# Altium PCB {TEX137}_F2837x_controlCARD_R1.3_PCB_PADS.PcbDoc (part 2 of 6)
Units mil, origin at the board's own origin, x right, y up, seen from the top; angles counter-clockwise.
Board outline 4163.98 x 2011.3 mil, 10 copper layers (Primary Side, Inner Layer 2, Inner Layer 3, Inner Layer 4, Inner Layer 5, Inner Layer 6, Inner Layer 7, Inner Layer 8, Inner Layer 9, Secondary Side), stack 103.5 mil thick; 292 components, 317 nets, 1400 pads, 1032 vias.
Unrouted connection lines stored in the file: 106.
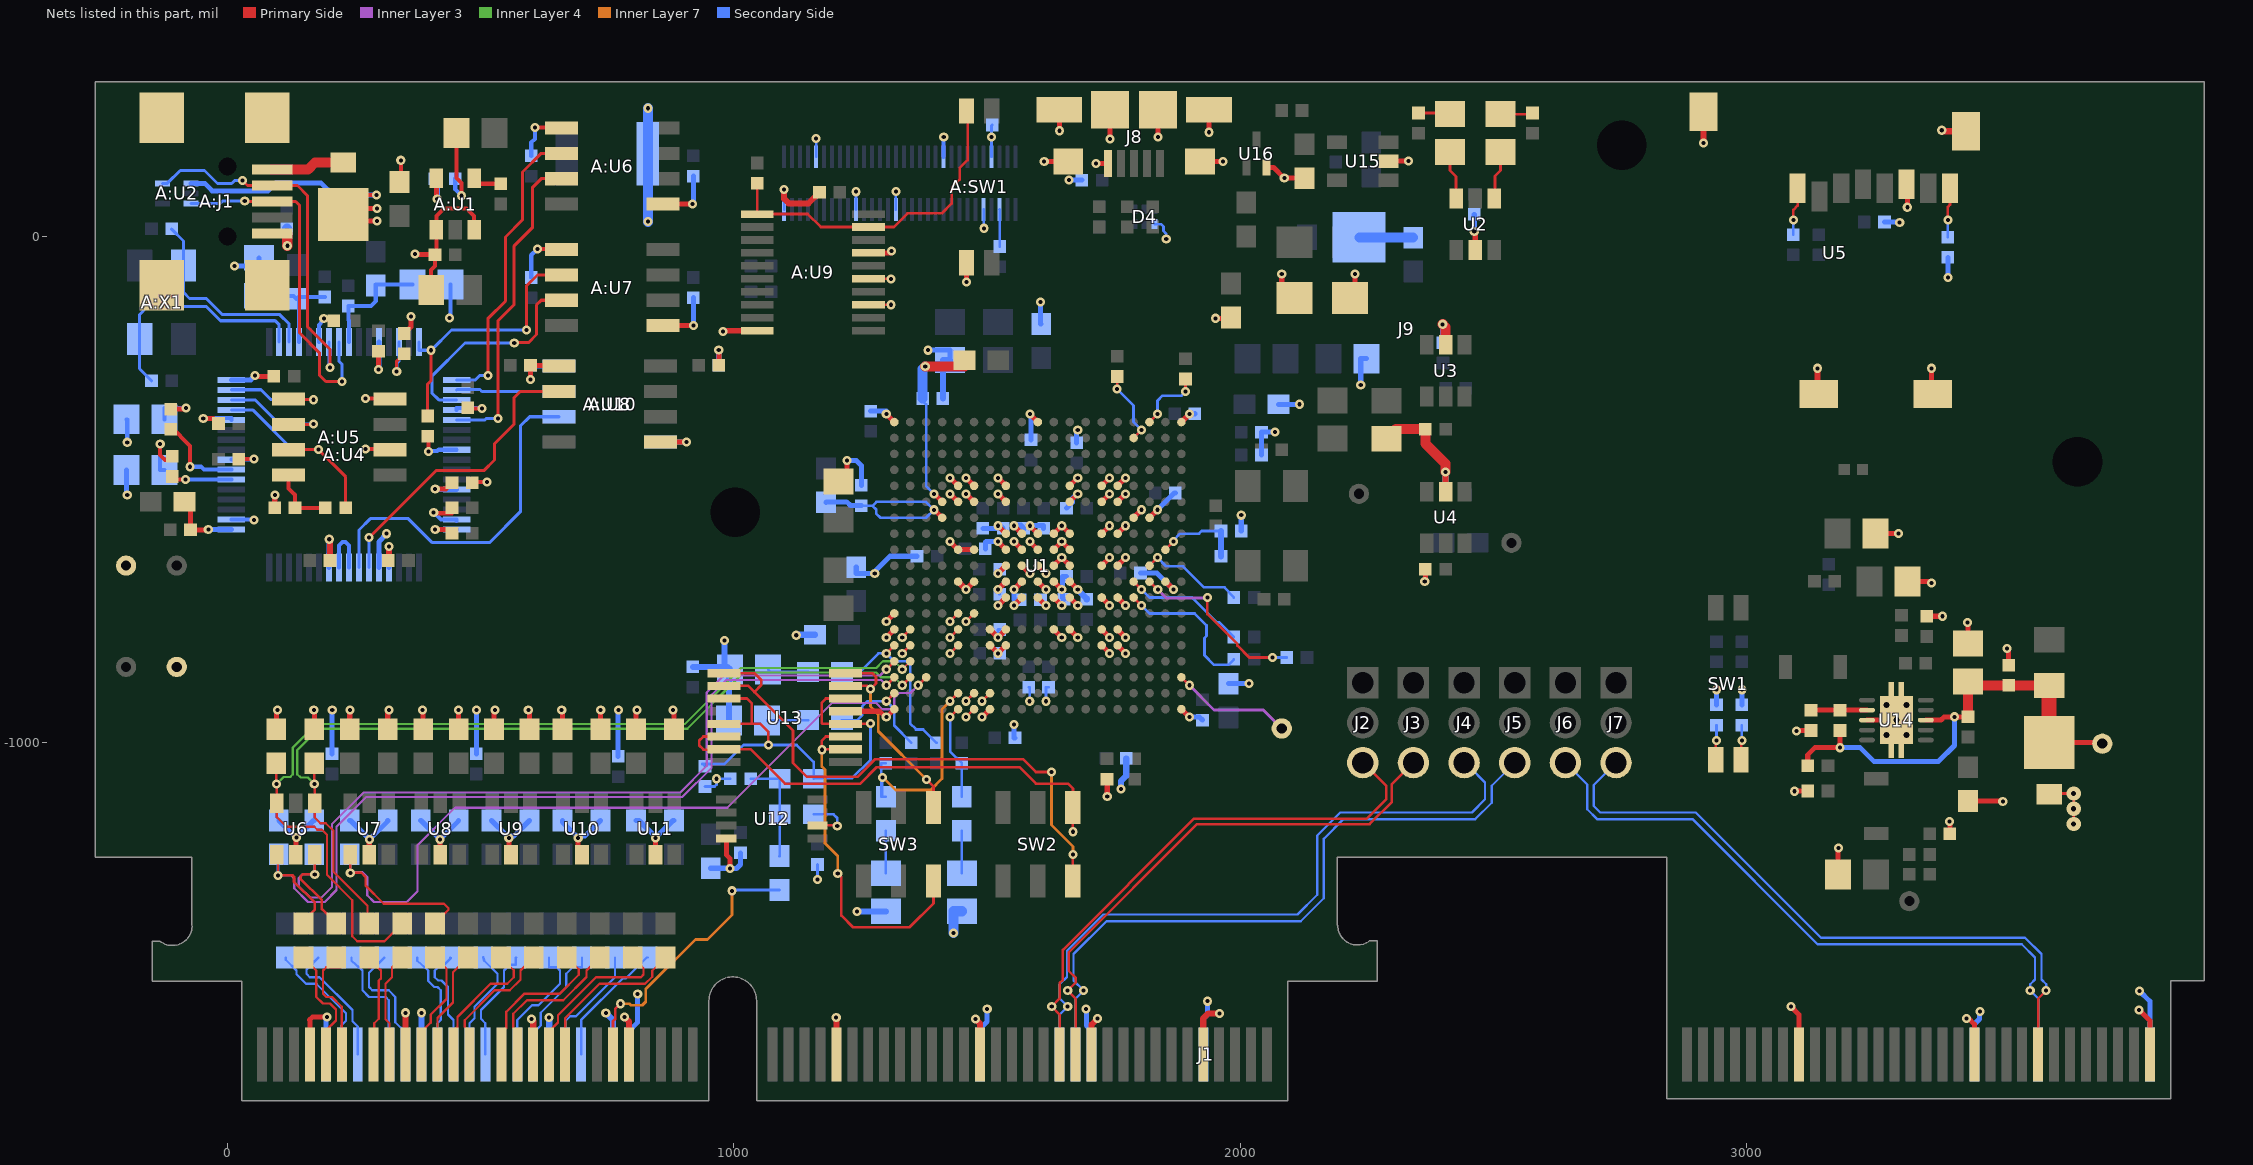
[diagram p10: the nets of this part, all layers, seen from the top]

## Via types
v1: diameter 18, hole 8, Primary Side to Secondary Side, 1025 vias
v2: diameter 28, hole 10, Primary Side to Secondary Side, 7 vias

## Nets (pads, with @x,y where several pads share a name; then routed paths per layer and width w, separated by ;. In a path a pad name is that pad's centre, name@x,y a point inside that pad or via, vN(x,y) a via of type N, cw(c..) or ccw(c..) an arc to the next point about the centre after c; other vN are vias at no path point) (continued)
$$$13142: R11.2 R12.2 U1.J18 | length 176.3
  Primary Side w5.3: U1.J18@1851.97,-618.5 v1(1867.76,-602.77)
  Secondary Side w5.3: v1(1867.76,-602.77) 1867.76,-600.35 1881.05,-587.02 1918.05,-587.02 1923.54,-581.54 R11.2@1961.54,-581.54
  Secondary Side w12: R12.2@1961.54,-631.54 R11.2@1961.54,-581.54
$$$13408: R54.2 R58.2 U1.V5 | length 442.3
  Primary Side w5.3: v1(1426.77,-917.72) U1.V5@1442.52,-901.97
  Inner Layer 7 w5.5: v1(1293,-1068) 1294,-1068 1319,-1093 1388.49,-1093 1410.9,-1070.59 1410.9,-933.59 v1(1426.77,-917.72)
  Secondary Side w5.3: v1(1293,-1068) R54.2@1293,-1106.5 ; R54.2@1300,-1106.5 R54.2@1293,-1106.5 ; R58.2@1300,-1040 1291,-1040 1291,-1106.5 R54.2@1293,-1106.5
$$$13414: R51.2 R55.2 U1.V1 | length 237.9
  Primary Side w5.3: v1(1300.79,-917.72) U1.V1@1316.54,-901.97
  Secondary Side w5.3: R51.2@1213.5,-955 1243.5,-955 1253.5,-945 1253.5,-927.52 1263.31,-917.72 v1(1300.79,-917.72) 1316.54,-933.47 1316.54,-966.02 1350,-999.49 R55.2@1350,-1000
$$$13416: R52.2 R56.2 U1.W5 | length 189.2
  Primary Side w5.3: v1(1426.77,-949.21) U1.W5@1442.52,-933.46
  Secondary Side w5.3: v1(1426.77,-949.21) 1426.77,-1016.77 R56.2@1450,-1040 R52.2@1450,-1106.5
$$$13417: R53.2 R57.2 U1.R1 | length 365.9
  Primary Side w5.3: v1(1300.79,-823.23) U1.R1@1316.54,-807.48
  Secondary Side w5.3: R53.2@1213.5,-860 1248.5,-860 1285.27,-823.23 v1(1300.79,-823.23) 1316.53,-838.98 1341.72,-838.98 1348.03,-845.29 1348.03,-961.52 1359.03,-972.52 1359.03,-973.52 1373.52,-973.52 R57.2@1400,-1000
$$$14266: R8.2 U1.L16 | length 243.4
  Primary Side w5.3: U1.L16@1788.98,-681.5 v1(1804.73,-697.25)
  Secondary Side w5.3: v1(1804.73,-697.25) 1820.5,-713.02 1904.52,-713.02 1953.92,-762.42 1958.44,-762.42 R8.2@1987.03,-791.02
$$$14269: R7.2 U1.M16 | length 297.9
  Primary Side w5.3: U1.M16@1788.98,-712.99 v1(1804.73,-728.74)
  Secondary Side w5.3: v1(1804.73,-728.74) 1820.46,-744.48 1909.48,-744.48 1933.03,-768.03 1933.03,-788.77 1929.03,-792.77 1929.03,-827.02 1948.03,-846.02 1976.03,-846.02 R7.2@1987.03,-835.02
$$$14311: R4.1 U1.K17 | length 206.2
  Primary Side w5.3: U1.K17@1820.47,-650 v1(1836.22,-634.25)
  Secondary Side w5.3: v1(1836.22,-634.25) 1853.51,-651.54 1886.54,-651.54 1928.02,-693.02 ; 1928.03,-693.02 1968.57,-693.02 R4.1@1987.03,-713.02
$$$14314: R3.1 U1.L17 | length 355.5
  Primary Side w5.3: U1.L17@1820.47,-681.5 1836.22,-697.25 v1(1836.83,-697.25) ; v1(1934.72,-713.01) 1934.72,-745.7 1993.78,-804.76 1993.78,-807.91 2017.41,-831.54 v1(2063.54,-831.54)
  Inner Layer 3 w5.5: v1(1836.83,-697.25) 1853.5,-713.92 1934.72,-713.92 v1(1934.72,-713.01)
  Secondary Side w5.3: v1(2063.54,-831.54) R3.1@2091.54,-831.54
$$$14317: R5.1 U1.A17 | length 136.3
  Primary Side w5.3: U1.A17@1820.47,-366.54 v1(1836.22,-350.79) ; v1(1891.54,-306.54) R5.1@1891.54,-281.54
  Secondary Side w5.3: v1(1836.22,-350.79) 1836.22,-324.5 1846.36,-314.36 1883.71,-314.36 v1(1891.54,-306.54)
$$$14320: R6.1 U1.B16 | length 148
  Primary Side w5.3: v1(1756.54,-301.54) R6.1@1756.54,-276.54 ; U1.B16@1788.98,-398.03 v1(1804.73,-382.28)
  Secondary Side w5.3: v1(1756.54,-301.54) 1788.98,-333.98 1788.98,-366.53 v1(1804.73,-382.28)
$$$14898: R22.1 SW1.3 | length 69.1
  Primary Side w5.3: SW1.3@2938.46,-1033.46 2938.46,-996.54 v1(2940,-995)
  Secondary Side w5.3: v1(2940,-995) R22.1@2940,-965
$$$14901: R23.1 SW1.4 | length 69.1
  Primary Side w5.3: SW1.4@2988.46,-1033.46 2988.46,-996.54 v1(2990,-995)
  Secondary Side w5.3: v1(2990,-995) R23.1@2990,-965
$$$15255: C47.2 R61.1 U13.3 U13.5 U13.12 U13.14 | length 897.1
  Primary Side w5.3: U13.5@980,-962.5 1034.95,-962.5 ; U13.3@980,-912.5 1025.95,-912.5 1034.95,-921.5 1034.95,-962.5 ; v1(1068,-1004) 1068,-978.5 1052,-962.5 1034.95,-962.5 ; U13.14@1220,-912.5 1181.54,-912.5 1173.54,-920.5 1173.54,-961.54 1174.5,-962.5 U13.12@1220,-962.5 1268.57,-962.5 v1(1269.54,-961.54)
  Secondary Side w5.3: C47.2@943,-1046 938.54,-1041.54 937.54,-1041.54 981.54,-1041.54 997.54,-1025.54 1019.07,-1004 v1(1068,-1004) 1123.96,-1004 1157.5,-1037.54 R61.1@1157.5,-1071 1158.96,-1069.54 1233.54,-1069.54 1269.54,-1033.54 v1(1269.54,-961.54)
$$$15995: D3.1 R83.2 | length 107.4
  Secondary Side w5.3: D3.1@2234.04,-1.54 D3.1@2235,-2.5
  Secondary Side w20: D3.1@2235,-2.5 R83.2@2341,-2.5
$$$16409: C68.2 R64.1 U14.7 | length 118.3
  Primary Side w10: C68.2@3126.54,-935.48 3125.54,-934.48 3125.54,-930.98 3130.04,-935.48 R64.1@3183.54,-935.48 3183.54,-935.31 U14.7@3236.93,-935.31
$$$18387: A:R17.1 A:SW1.4 A:U9.1 A:U9.19 | length 672.8
  Primary Side w5.3: A:R17.1@1046,105 1046,44.12 A:U9.1@1046.06,44.06 1145.64,44.06 1171.64,18.46 A:U9.19@1266.06,18.46 1315.78,18.46 1342.66,45.35 1410.28,45.35 1429.96,65.03 1429.96,96.53 1445.68,112.25 1445.68,134.76 1461.43,150.51 1461.43,247.64 A:SW1.4@1458.88,247.64
$$$19812: SW2.3 U13.1 U13.2 | length 1126
  Primary Side w5.3: U13.2@980,-887.5 1028.5,-887.5 1040.39,-899.39 ; U13.1@980,-862.5 1040.95,-862.5 1053.95,-875.5 1053.95,-885.84 1040.39,-899.39 ; v1(1627.03,-1057.47) 1596,-1057.47 1570.53,-1032 1279,-1032 1244,-1067 1144,-1067 1116.5,-1039.5 1116.5,-975.5 1040.39,-899.39 ; SW2.3@1668.9,-1272.83 1668.9,-1221.1 v1(1669.53,-1220.47)
  Inner Layer 7 w5.5: v1(1627.03,-1057.47) 1627.03,-1161.97 1669.53,-1204.47 v1(1669.53,-1220.47)
$$$19948: SW3.6 U13.15 U13.16 | length 429.2
  Primary Side w5.3: U13.15@1220,-887.5 1263.5,-887.5 v1(1269.54,-893.54) 1280.55,-882.52 1280.55,-869.54 1273.54,-862.52 U13.16@1220,-862.5 ; v1(1380,-1072) 1387.5,-1079.5 1387.5,-1079.6 1393.9,-1086 SW3.6@1393.9,-1127.17
  Inner Layer 7 w5.5: v1(1269.54,-893.54) 1269.54,-928 1285,-943.46 1285,-977 v1(1380,-1072)
$$$20039: SW3.3 U13.10 U13.11 | length 713.2
  Primary Side w5.3: v1(1205,-1258) 1212,-1265 1212,-1341 1235,-1364 1346.9,-1364 1393.9,-1317 SW3.3@1393.9,-1272.83 ; U13.10@1220,-1012.5 1174.57,-1012.5 v1(1173.54,-1013.54) 1173.54,-995.5 1181.54,-987.5 U13.11@1220,-987.5
  Inner Layer 7 w5.5: v1(1173.54,-1013.54) 1173.54,-1046.54 1180,-1053 1180,-1198.2 1205,-1223.2 v1(1205,-1258)
$$$20040: SW2.6 U13.6 U13.7 | length 948.1
  Primary Side w5.3: U13.6@980,-987.5 939.53,-987.5 931.56,-995.47 931.56,-1005.47 939.53,-1013.44 979.06,-1013.44 U13.7@980,-1012.5 1032.5,-1012.5 1100.47,-1080.47 1249.53,-1080.47 1282,-1048 1563.53,-1048 1596,-1080.47 1659.53,-1080.47 1669.53,-1090.47 1669.53,-1126.54 SW2.6@1668.9,-1127.17 1668.9,-1174.84 v1(1669.53,-1175.47)
$$$20605: C16.2 R53.1 | length 81.1
  Secondary Side w5.3: C16.2@1067.5,-855 1072.5,-860 R53.1@1146.5,-860
$$$20610: C17.2 R54.1 | length 84
  Secondary Side w5.3: C17.2@1300,-1257.5 R54.1@1300,-1173.5
$$$20616: C14.2 R51.1 | length 81.4
  Secondary Side w5.3: C14.2@1065.5,-956 1066.5,-955 R51.1@1146.5,-955
$$$20617: C15.2 R52.1 | length 84
  Secondary Side w5.3: C15.2@1450,-1257.5 R52.1@1450,-1173.5
$$$22741: A:C4.2 A:U1.4 | length 63.6
  Primary Side w8: A:U1.4@487.21,114.9 487.21,103.9 A:C4.2@539.81,103.9
$$$22987: A:D2.2 A:R1.2 | length 166.7
  Primary Side w8: A:D2.2@452.31,203.9 452.28,135.19 452.28,115.19 462.28,105.19 v1(462.28,80.19)
  Secondary Side w8: A:R1.2@449.81,113.9 449.81,93.03 450.26,92.58 450.26,92.21 v1(462.28,80.19)
$$$23904: A:R7.1 A:U4.24 | length 89.4
  Primary Side w8: A:R7.1@395.23,-394.7 397.28,-394.7 v1(397.28,-424.81)
  Secondary Side w8: v1(397.28,-424.81) 397.28,-424.17 414.28,-424.17 417.19,-421.26 A:U4.24@452.69,-421.26
$$$24422: A:R8.1 A:U4.28 | length 82.3
  Primary Side w10: v1(410.24,-498.51) 431.01,-498.51 A:R8.1@443.42,-486.1
  Secondary Side w10: v1(410.24,-498.51) 410.24,-500.02 A:U4.28@452.69,-500.02
$$$24639: A:R9.1 A:U4.32 | length 83.3
  Primary Side w10: v1(410.24,-578.51) 443.42,-578.51 A:R9.1@443.42,-586.1
  Secondary Side w10: v1(410.24,-578.51) 410.51,-578.78 A:U4.32@452.69,-578.78
$$$24688: A:U4.40 A:U4.41 | length 113.2
  Secondary Side w8: A:U4.41@220.34,-653.6 220,-653.26 220,-610 227,-603 233.03,-603 240.03,-610 A:U4.40@240.03,-653.6
$$$25045: A:J1.2 A:U2.5 A:U4.7 | length 729.7
  Primary Side w6: v1(30,110) 39.61,100.39 A:J1.2@88.58,100.39 138.24,100.39 158.24,80.39 158.24,-178.51 202.24,-222.51 v1(202.24,-258.51)
  Secondary Side w6: A:U2.5@-128,104.69 -118.56,104.69 -93.06,130.19 -45.19,130.19 -19.5,104.5 8.5,104.5 14,110 v1(30,110) ; A:U4.7@200.65,-208.6 200.65,-256.92 v1(202.24,-258.51)
$$$25047: A:J1.3 A:U2.3 A:U4.8 | length 701.2
  Primary Side w6: v1(34.24,69.49) 34.83,68.9 78.24,68.9 A:J1.3@88.58,68.9 134.83,68.9 142.24,61.49 142.24,-190.51 182.24,-230.51 182.24,-274.51 194.24,-286.51 v1(226.24,-286.51)
  Secondary Side w6: A:U2.3@-72,65.31 -13.76,65.31 -9.58,69.49 v1(34.24,69.49) ; A:U4.8@220.34,-208.6 220.34,-246.51 226.24,-252.4 v1(226.24,-286.51)
$$$25123: A:J1.5 A:J1.6 A:J1.7 A:J1.8 A:J1.9 A:R10.1 | length 99
  Primary Side w8: A:J1.7@78.24,-96.46 A:J1.7@78.74,-96.46
  Primary Side w10: A:J1.7@78.24,-96.46 A:J1.7@88.58,-96.46 ; A:J1.5@88.58,5.91 A:J1.5@118.24,5.91
  Primary Side w20: v1(118.24,-18.51) A:J1.5@118.24,5.91
  Secondary Side w10: v1@117.28,-17.55 v1(118.24,-18.51)
  Secondary Side w20: v1@117.28,-17.55 A:R10.1@117.28,15.19
$$$25417: A:R6.2 A:U4.6 | length 69.5
  Primary Side w10: v1(190.24,-162.51) A:R6.2@210.24,-166.51
  Secondary Side w8: A:U4.6@180.96,-208.6 180.96,-175.16 v1(190.24,-162.51)
$$$25426: A:R5.2 A:U4.14 | length 100.4
  Primary Side w6: v1(334.24,-266.51) 334.24,-246.53 A:R5.2@348.94,-231.83
  Secondary Side w6: v1(334.24,-266.51) 334.48,-266.26 334.48,-250.51 338.48,-246.51 A:U4.14@338.48,-208.6
$$$25435: C81.2 R75.2 U1.G4 | length 392.2
  Primary Side w10: v1(1395.29,-539.78) U1.G4@1411.02,-555.51
  Secondary Side w5.3: C81.2@1251.54,-531.54 1273.03,-531.54 1273.52,-532.03 ; 1273.52,-532.03 1281.54,-524.02 1379.52,-524.02 v1(1395.29,-539.78) 1379.55,-555.51 1288.97,-555.51 1281.18,-547.72 1281.18,-539.68 1273.52,-532.03
  Secondary Side w10: R75.2@1181.54,-525.04 1182.47,-524.1 1222.63,-524.1 1230.06,-531.54 C81.2@1251.54,-531.54
$$$25439: C80.2 R74.2 U1.F4 | length 421.4
  Primary Side w10: v1(1395.27,-508.27) U1.F4@1411.02,-524.02 ; R74.2@1455.04,-256.78 R74.2@1455.04,-244.48
  Primary Side w20: v1(1377.68,-256.78) R74.2@1455.04,-256.78
  Secondary Side w5.3: C80.2@1372.52,-320 1371.54,-297.01 1371.54,-323.54 1379.53,-331.53 1379.53,-492.52 v1(1395.27,-508.27)
  Secondary Side w20: C80.2@1372.52,-320 1372.52,-261.94 v1(1377.68,-256.78)
$$$25557: A:R13.1 A:U4.60 | length 95.1
  Primary Side w10: v1(-47.72,-359.81) -27.08,-359.81 A:R13.1@-17.56,-369.33
  Secondary Side w8: v1(-47.72,-359.81) -47.72,-358.19 7.69,-358.19 A:U4.60@7.69,-362.19
$$$25559: A:R14.1 A:U4.36 | length 70.2
  Primary Side w12: A:R14.1@317.56,-639.81 319,-638.37 v1(319,-612)
  Secondary Side w10: A:U4.36@318.79,-653.6 318.79,-612 v1(319,-612)
$$$25663: A:R11.1 A:U4.54 | length 125.8
  Primary Side w8: A:R11.1@-109,-474 -111.58,-479.81 v1(-82.72,-479.81)
  Secondary Side w8: v1(-82.72,-479.81) -46.87,-479.81 -46.35,-480.33 A:U4.54@7.69,-480.33
$$$25664: A:R12.1 A:U4.55 | length 184
  Primary Side w8: A:R12.1@-111.58,-381.1 -111.58,-375.73 -73.76,-413.55 v1(-73.76,-454.81)
  Secondary Side w8: v1(-73.76,-454.81) -52.18,-454.81 -46.35,-460.64 A:U4.55@7.69,-460.64
$$$25838: A:D3.1 A:R11.2 | length 110.9
  Primary Side w8: v1(-132.72,-409.81) -132.72,-431.31 -122.94,-441.1 A:R11.2@-109,-434
  Secondary Side w8: v1(-132.72,-409.81) -132.72,-461.1 A:D3.1@-124.08,-461.1
$$$25841: A:D4.1 A:R12.2 | length 95.8
  Primary Side w10: A:R12.2@-111.58,-341.1 -84.36,-341.1 v1(-81.76,-338.51)
  Secondary Side w8: A:D4.1@-124.08,-361.1 -124.08,-338.51 v1(-81.76,-338.51)
$$$26166: A:U4.63 A:U5.1 | length 221.9
  Primary Side w6: A:U5.1@120.83,-321.1 120.83,-322.51 v1(170.24,-322.51)
  Secondary Side w6: A:U4.63@7.69,-303.12 7.69,-302.79 66.24,-302.79 85.96,-322.51 v1(170.24,-322.51)
$$$26177: A:U4.62 A:U5.2 | length 232.3
  Primary Side w6: A:U5.2@120.83,-371.1 170.24,-371.1 v1(170.24,-370.51)
  Secondary Side w6: A:U4.62@7.69,-322.81 54.54,-322.81 102.24,-370.51 v1(170.24,-370.51)
$$$26181: A:R16.2 A:U4.61 A:U5.3 | length 400.8
  Primary Side w6: A:U5.3@120.83,-421.1 v1(179.79,-421.1) 233.42,-474.73 A:R16.2@233.42,-536.1
  Secondary Side w6: A:U4.61@7.69,-342.5 49.97,-342.5 128.57,-421.1 v1(179.79,-421.1)
$$$26231: A:R15.2 A:R16.1 A:U5.4 | length 130.2
  Primary Side w8: A:U5.4@120.83,-471.1 120.83,-497.56 133.42,-510.15 A:R15.2@133.42,-536.1 A:R16.1@193.42,-536.1
$$$26444: R17.1 U5.8 | length 98.4
  Primary Side w5.3: v1(3396.54,32.52) 3396.54,58.06 3401,62.52 U5.8@3401,95
  Secondary Side w5.3: R17.1@3396.54,-1.54 v1(3396.54,32.52)
$$$26493: A:C18.2 A:U4.2 A:X1.1 | length 472.3
  Secondary Side w6: A:C18.2@-150,-285 -173.76,-261.24 -173.76,-203.29 A:X1.1@-173.3,-202.83 -173.76,-202.37 -173.76,-154.51 -157.76,-138.51 -41.8,-138.51 -13.76,-166.54 94.24,-166.54 102.2,-174.51 A:U4.2@102.2,-208.6
$$$26501: A:C19.2 A:U4.3 A:X1.3 | length 407.5
  Secondary Side w6: A:C19.2@-110,15 -110,14.06 -86.7,-9.24 A:X1.3@-86.7,-54.81 ; A:X1.3@-86.7,-57.17 A:X1.3@-86.7,-54.81 ; A:U4.3@121.89,-208.6 121.89,-173.1 103.3,-154.51 -9.76,-154.51 -41.76,-122.51 -74.7,-122.51 -86.7,-110.51 A:X1.3@-86.7,-54.81
$$$26510: R16.2 U5.1 | length 95
  Primary Side w5.3: v1(3091.54,32.52) 3091.54,52.52 3100,60.98 U5.1@3100,95
  Secondary Side w5.3: R16.2@3091.54,3.46 v1(3091.54,32.52)
$$$26898: A:C15.2 A:C16.2 A:L2.2 A:U4.9 | length 235.4
  Secondary Side w8: A:U4.9@240.03,-208.6 240.03,-166.14 238.69,-164.79 A:C16.2@238.69,-137.32 283.42,-137.32 292.87,-127.88 A:C15.2@292.87,-97.18 292.87,-95.18 A:L2.2@365.62,-95.18
$$$26901: A:C13.2 A:C14.2 A:L1.2 A:U4.4 | length 274.1
  Secondary Side w8: A:L1.2@62.28,-117.31 130.73,-117.31 A:C13.2@136.58,-123.16 ; A:C13.2@137.28,-123.31 137.13,-123.16 A:C13.2@136.58,-123.16 ; A:U4.4@141.58,-208.6 141.58,-119.81 A:C14.2@192.28,-119.81 139.94,-119.81 A:C13.2@136.58,-123.16
$$$28456: J9.54 R25.2 | length 63.4
  Secondary Side w5.3: J9.54@1508.66,157.16 v1(1508.68,196.53) 1508.68,218.66 R25.2@1510,220
$$$28488: J9.55 R26.1 | length 73.5
  Secondary Side w5.3: J9.55@1524.41,53.22 1525,52.63 R26.1@1525,-20
$$$30996: LD2.2 R13.2 | length 62.9
  Primary Side w5.3: R13.2@2351.54,243.46 2411.5,243.46 LD2.2@2413.56,241.4
$$$30998: LD2.1 U2.6 | length 96.7
  Primary Side w5.3: LD2.1@2413.56,166.4 2413.56,129.87 2425.6,117.84 2425.6,75.46 U2.6@2426.16,74.9
$$$31033: LD3.1 U2.4 | length 96.7
  Primary Side w5.3: U2.4@2500.96,74.9 2502.6,76.53 2502.6,118.91 2513.56,129.87 LD3.1@2513.56,166.4
$$$31036: LD3.2 R14.2 | length 65
  Primary Side w5.3: LD3.2@2513.56,241.4 2576.54,241.4 R14.2@2576.54,243.46
$$$31437: TP1.1 U1.U19 | length 239.9
  Primary Side w5.3: U1.U19@1883.46,-870.47 v1(1899.21,-886.22)
  Inner Layer 3 w5.5: v1(1899.21,-886.22) 1947.99,-935 2045,-935 TP1.1@2081.54,-971.54
$$$31715: C46.2 R59.1 R60.2 R61.2 | length 210.2
  Secondary Side w5.3: C46.2@1033,-1071 R61.2@1090.5,-1071 R60.2@1090.5,-1141 1090.5,-1223 R59.1@1090,-1223.5
$$$31721: R60.1 U12.6 | length 104.9
  Primary Side w5.3: U12.6@1165,-1162.8 1202.8,-1162.8 v1(1204,-1164)
  Secondary Side w5.3: R60.1@1157.5,-1141 1197,-1141 1204,-1148 v1(1204,-1164)
EMU_1V8: A:C5.2 A:C6.2 A:C7.2 A:C8.2 A:U4.12 A:U4.37 A:U4.49 A:U4.64 | length 402.3
  Primary Side w10: A:C5.2@-84.5,-524 -72.96,-524 A:C7.2@-72.96,-579.43 ; A:C7.2@-73.95,-580.42 A:C7.2@-72.96,-579.43 ; v1(-37.76,-578.51) -38.68,-579.43 A:C7.2@-72.96,-579.43 ; v1(54.24,-274.51) 54.24,-276.28 A:C8.2@91.77,-276.28 ; v1(298.24,-262.51) A:C6.2@298.24,-226.51
  Secondary Side w10: v1(-37.76,-578.51) -37.49,-578.78 A:U4.49@7.69,-578.78 ; A:U4.64@7.69,-283.43 46.24,-283.43 46.24,-282.51 v1(54.24,-274.51) ; v1(298.24,-262.51) 299.1,-261.64 A:U4.12@299.1,-208.6 ; A:U4.37@299.1,-653.6 299.1,-603 v1(314,-587)
EMU_3V3: A:C2.2 A:C9.2 A:C10.2 A:C11.2 A:C12.2 A:C20.2 A:C22.2 A:C25.2 A:C27.2 A:L1.1 A:L2.1 A:R1.1 A:R5.1 A:R8.2 A:R15.1 A:TP1.1 A:U1.5 A:U4.20 A:U4.31 A:U4.42 A:U4.50 A:U4.56 A:U5.6 A:U5.8 A:U6.1 A:U7.1 A:U8.8 A:U10.1 | length 1258.7
  Primary Side w8: A:C12.2@22.24,-440.28 22.24,-439.81 v1(52.28,-439.81) ; v1(272.28,-419.81) 320.83,-419.81 A:U5.6@320.83,-421.1 ; v1(272.28,-319.81) 320.83,-319.81 A:U5.8@320.83,-321.1 ; A:C2.2@339.81,107.4 342.28,107.4 v1(342.28,150.19) ; v1(407.28,-544.81) 407.28,-546.6 443.42,-546.6 A:C10.2@443.42,-536.1 ; A:C9.2@474.69,-338.23 474.69,-339.81 v1(502.28,-339.81) ; A:R8.2@483.42,-486.1 483.42,-484.81 v1(512.28,-484.81) ; v1(607.28,215.19) 659.81,215.19 A:U6.1@659.81,213.9 ; v1(612.28,-24.81) 659.81,-24.81 A:U7.1@659.81,-26.1 ; A:U10.1@655,-256.1 A:U10.1@655,-254.81
  Primary Side w10: A:R15.1@93.42,-536.1 93.42,-510.51 v1(94.24,-510.51) ; A:R5.1@348.94,-191.83 362.24,-178.53 v1(362.24,-158.51) ; A:U1.5@412.41,114.9 412.41,75.32 v1(414.24,73.49) ; v1(598.24,-282.51) A:C27.2@598.24,-254.51 653.41,-254.51 A:U10.1@655,-256.1
  Primary Side w12: v1(201,-598) 202.56,-599.56 A:C11.2@202.56,-639.81
  Secondary Side w8: A:U4.50@7.69,-559.09 52.28,-559.09 v1(52.28,-559.81) ; A:U4.56@7.69,-440.95 52.28,-440.95 v1(52.28,-439.81) ; v1(407.28,-544.81) 421.56,-559.09 A:U4.31@452.69,-559.09 A:U4.31@452.69,-561.81 ; v1(438.56,-161.1) 440.62,-161.1 A:L2.1@440.62,-95.18 ; A:U4.20@452.69,-342.5 452.69,-338.5 502.28,-338.5 v1(502.28,-339.81) ; A:C22.2@599.81,-81.1 599.81,-37.27 v1(612.28,-24.81) ; A:C20.2@599.81,158.9 599.81,185.06 607.28,192.53 v1(607.28,215.19)
  Secondary Side w10: v1(14.24,-58.51) 62.28,-58.51 A:L1.1@62.28,-42.31 ; A:U4.42@200.65,-653.6 200.65,-598.35 v1(201,-598) ; A:R1.1@409.81,113.9 414.24,109.47 v1(414.24,73.49) ; v1(598.24,-282.51) A:C25.2@598.24,-254.51 599.83,-256.1 A:U8.8@654.81,-256.1
EMU_5V0: A:C1.2 A:C3.1 A:D1.1 A:D3.2 A:D4.2 A:U1.1 A:U1.3 A:U2.1 | length 1053.1
  Primary Side w8: A:D1.1@228.81,43.17 228.81,81.49 v1(294.24,81.49) ; A:C3.1@402.31,-106.1 402.31,-66.35 409.81,-58.85 A:C1.2@409.81,-36.1 412.41,-36.1 A:U1.1@412.41,12.9 412.41,40.4 427.21,55.19 472.42,55.19 487.21,40.4 A:U1.3@487.21,12.9
  Primary Side w10: v1(295,30) 228.81,30 A:D1.1@228.81,43.17 228.81,55 v1(295,55) ; v1(370.24,-34.51) 371.83,-36.1 A:C1.2@409.81,-36.1
  Secondary Side w8: A:D4.2@-199.08,-361.1 -197.76,-361.1 v1(-197.76,-406.51)
  Secondary Side w10: A:D3.2@-199.08,-461.1 -199.08,-509.19 v1(-197.76,-510.51) ; A:U2.1@-72,104.69 -44.69,104.69 -30,90 80,90 95,105 185,105 208.51,81.49 v1(294.24,81.49)
EMU_SCI-RX: A:U4.38 A:U10.2 | length 603.4
  Primary Side w6: v1(279.41,-594.81) 411.71,-462.51 506.24,-462.51 527.31,-441.44 527.31,-409.44 566.24,-370.51 566.24,-318.1 578.24,-306.1 A:U10.2@655,-306.1
  Secondary Side w6: A:U4.38@279.41,-653.6 v1(279.41,-594.81)
EMU_SCI-TX: A:U4.39 A:U8.6 | length 700.1
  Secondary Side w6: A:U4.39@259.72,-653.6 259.72,-579.81 282.28,-557.25 356.98,-557.25 404.54,-604.81 517.28,-604.81 578.24,-543.85 578.24,-374.51 596.65,-356.1 A:U8.6@654.81,-356.1
EMU_TCK: A:R7.2 A:U4.16 A:U7.2 | length 543.3
  Primary Side w6: A:R7.2@395.23,-354.7 395.23,-291.53 402.28,-284.48 v1(402.28,-224.81) ; v1(590.24,-184.81) 590.24,-98.14 612.27,-76.1 A:U7.2@659.81,-76.1
  Secondary Side w6: A:U4.16@377.86,-208.6 377.86,-224.81 v1(402.28,-224.81) 442.28,-184.81 v1(590.24,-184.81)
EMU_TDI: A:U4.17 A:U6.2 | length 587.8
  Primary Side w6: v1(514.24,-274.81) 514.24,-162.51 548.83,-127.91 548.83,-1.1 582.63,32.69 582.63,127.21 619.31,163.9 A:U6.2@659.81,163.9
  Secondary Side w6: A:U4.17@452.69,-283.43 489.32,-283.43 497.94,-274.81 v1(514.24,-274.81)
EMU_TDO: A:U4.18 A:U8.7 | length 203.9
  Secondary Side w6: A:U4.18@452.69,-303.12 453.3,-302.51 498.65,-302.51 502.24,-306.1 A:U8.7@654.81,-306.1
EMU_TMS: A:U4.19 A:U7.3 | length 440.5
  Primary Side w6: v1(566.24,-210.51) 566.94,-209.81 594.24,-209.81 610.24,-193.81 610.24,-135.18 619.31,-126.1 A:U7.3@659.81,-126.1
  Secondary Side w6: A:U4.19@452.69,-322.81 417.28,-322.81 403.56,-309.09 403.56,-276.1 469.16,-210.51 v1(566.24,-210.51)
EMU_TRSTN: A:U4.21 A:U6.3 | length 632
  Primary Side w6: v1(534.24,-359.81) 534.24,-166.51 566.24,-134.51 566.24,-18.7 602.68,17.75 602.68,97.27 619.31,113.9 A:U6.3@659.81,113.9
  Secondary Side w6: A:U4.21@452.69,-362.19 508.04,-362.19 510.42,-359.81 v1(534.24,-359.81)
EMU_USB_5V0: A:D1.2 A:J1.1 | length 145.9
  Primary Side w20: A:J1.1@88.58,131.89 159.31,131.89 173.09,145.67 A:D1.2@228.81,145.67
GND: A:C21.1 A:C23.1 A:C24.1 A:C26.1 A:C28.1 A:C31.1 A:SW1.1 A:U6.5 A:U7.5 A:U8.4 A:U9.10 A:U9.13 A:U9.15 A:U9.17 A:U10.5 C1.1 C2.1 C3.1 C4.1 C5.1 C6.1 C9.1 C10.1 C11.1 C12.1 C13.1 C14.1 C15.1 C16.1 C17.1 C18.1 C19.1 C20.1 C21.1 C22.1 C23.1 C24.1 C25.1 C26.1 C27.1 C28.1 C29.1 C30.1 C31.1 C32.1 C33.1 C34.1 C35.1 C36.1 C37.1 C38.1 C39.1 C40.1 C41.1 C42.2 C43.2 C44.1 C45.1 C46.1 C47.1 C48.1 C49.2 C50.2 C51.2 C52.2 C53.2 C54.2 C55.2 C56.2 C57.2 C58.2 C59.2 C60.2 C61.2 C62.2 C63.2 C64.2 C65.1 C66.1 C67.1 C68.1 C70.1 C71.1 C72.1 C73.1 C74.1 C75.1 C76.1 C77.1 C78.1 C79.1 C80.1 C81.1 C82.1 C83.1 C84.1 C85.1 C86.1 C87.1 C88.1 C89.1 C90.1 C91.1 C92.1 C93.2 C94.2 C95.1 D4.4 J1.7 J1.10 J1.19 J1.22 J1.35 J1.38 J1.46 J1.47 J1.65 J1.83 J1.97 J1.111 J1.135 J1.157 J1.179 J8.5 J8.6 J8.7 J8.8 J8.9 J8.10 J8.11 J9.1 J9.10 J9.19 J9.29 J9.42 J9.51 LD1.1 R9.1 R11.1 R17.2 R22.2 R23.2 R70.2 R71.2 R73.2 R79.2 R86.2 TP7.1 U1.A1 U1.A10 U1.A19 U1.E5 U1.E6 U1.E8 U1.E12 U1.E14 U1.E15 U1.F5 U1.F6 U1.F8 U1.F12 U1.F14 U1.F15 U1.G16 U1.G17 U1.H8 U1.H9 U1.H10 U1.H11 U1.H12 U1.H14 U1.H15 U1.J5 U1.J6 U1.J8 U1.J9 U1.J10 U1.J11 U1.J12 U1.K8 U1.K9 U1.K10 U1.K11 U1.K12 U1.K14 U1.K15 U1.L5 U1.L6 U1.L8 U1.L9 U1.L10 U1.L11 U1.L12 U1.L18 U1.M8 U1.M9 U1.M10 U1.M11 U1.M12 U1.M14 U1.M15 U1.N1 U1.N5 U1.N6 U1.P1 U1.P2 U1.P5 U1.P7 U1.P8 U1.P11 U1.P12 U1.P14 U1.P15 U1.R2 U1.R5 U1.R7 U1.R8 U1.R14 U1.R15 U1.V6 U1.V7 U1.W1 U1.W6 U1.W7 U1.W19 U2.2 U3.2 U4.2 U5.6 U5.9 U5.10 U5.11 U5.12 U6.2 U7.2 U8.2 U9.2 U10.2 U11.2 U12.4 U13.13 U14.8 U14.15 U14.16 U14.17 U14.18 U14.19 U14.20 U14.21 U14.22 U14.23 U15.2 U16.2 | length 10306.2
  Primary Side w5: v1(1426.77,-823.23) U1.R5@1442.52,-807.48
  Primary Side w5.3: A:U9.13@1266.06,-135.08 1309.99,-135.08 v1(1309.99,-135.02) ; A:U9.15@1266.06,-83.9 1308.99,-83.9 v1(1309.99,-84.02) ; v1(1332.28,-823.23) U1.R2@1348.03,-807.48 ; v1(1332.28,-791.73) U1.P2@1348.03,-775.98 ; v1(1426.77,-791.73) U1.P5@1442.52,-775.98 ; v1(1426.77,-760.24) U1.N5@1442.52,-744.49 ; v1(1458.27,-949.21) U1.W6@1474.02,-933.46 ; v1(1458.27,-917.72) U1.V6@1474.02,-901.97 ; v1(1458.27,-760.24) U1.N6@1474.02,-744.49 ; v1(1489.76,-917.72) U1.V7@1505.51,-901.97 ; v1(1950.46,-161.75) 1981.54,-161.75 C95.1@1981.54,-160.04 ; U14.22@3275.32,-984.53 3275.79,-985 3285.16,-985 U14.15@3285.16,-1014.06 ; U14.20@3275.32,-925.47 3283.63,-925.47 3285.16,-927 U14.18@3285.16,-895.94 ; U14.19@3295,-955 3304.84,-955 U14.16@3304.84,-1014.06 ; U14.17@3304.84,-895.94 3304.84,-927 3313.16,-927 U14.21@3314.69,-925.47
  Primary Side w10: C21.1@96.54,-973.04 96.54,-937.46 v1(99,-935) ; U6.2@135,-1221 135,-1188.07 v1(136.54,-1186.54) ; J1.7@162.8,-1615.1 162.8,-1547.78 162.12,-1547.1 167.68,-1541.54 v1(196.54,-1541.54) ; v1(170.5,-935) 171.54,-936.04 C20.1@171.54,-973.04 ; C25.1@241.54,-973.04 241.54,-935.46 v1(242,-935) ; U7.2@280,-1221 280,-1192.48 v1(280.54,-1190.48) ; C24.1@316.54,-973.04 316.54,-937.46 v1(319,-935) ; v1(385,-935) 386.54,-936.54 C29.1@386.54,-973.04 ; v1(419.54,-1190.48) 420,-1192.48 U8.2@420,-1221 ; v1(456.5,-935) v1(456.5,-935) C28.1@456.54,-973.04 ; C33.1@526.54,-973.04 526.54,-936.46 v1(528,-935) ; v1(555.54,-1187.48) 555.54,-1221 U9.2@560,-1221 ; v1(594,-935) 596.54,-935 C32.1@596.54,-973.04 ; v1(660,-935) 661.54,-936.54 C37.1@661.54,-973.04 ; v1(692.54,-1187.48) 692.54,-1221 U10.2@700,-1221 ; C36.1@736.54,-973.04 736.54,-935.46 v1(737,-935) ; C41.1@806.54,-973.04 806.54,-936.96 v1(808.5,-935) ; U11.2@845,-1221 845,-1188.98 v1(845.04,-1187.48) ; A:U10.5@855,-406.1 905.57,-406.1 v1(906.06,-405.6) ; A:U7.5@859.81,-176.1 919.91,-176.1 v1(920.04,-175.98) ; A:U6.5@859.81,63.9 v1(918.06,63.9) ; v1(880,-935) 881.54,-936.54 C40.1@881.54,-973.04 ; v1(970.04,-223.98) 970.24,-224.18 A:C28.1@970.24,-254.51 ; v1(978.06,-188.1) 979.91,-186.26 A:U9.10@1046.06,-186.26 ; U12.4@985,-1188.4 985,-1221 992,-1228 v1(992,-1248) ; C82.1@1206.54,-484.04 1223.03,-484.04 v1(1223.03,-442.52) ; U13.13@1220,-937.5 1287.11,-937.52 v1(1300.79,-949.21) U1.W1@1316.54,-933.46 ; A:U9.17@1266.06,-32.71 1309.99,-32.71 v1(1310.99,-29.02) ; v1(1300.79,-791.73) U1.P1@1316.54,-775.98 ; v1(1300.79,-760.24) U1.N1@1316.54,-744.49 ; v1(1300.79,-350.79) U1.A1@1316.54,-366.54 ; v1(1426.77,-602.75) U1.J5@1442.52,-618.5 U1.J6@1474.02,-618.5 ; v1(1426.77,-508.27) U1.F5@1442.52,-524.02 ; v1(1426.77,-476.77) U1.E5@1442.52,-492.52 ; v1(1458.27,-697.25) U1.L6@1474.02,-681.5 ; v1(1458.27,-508.27) U1.F6@1474.02,-524.02 ; v1(1458.27,-476.77) U1.E6@1474.02,-492.52 ; A:SW1.1@1458.88,-52.36 1458.88,-90.03 v1(1459.49,-90.03) ; v1(1489.76,-949.21) U1.W7@1505.51,-933.46 ; U1.R7@1505.51,-807.48 v1(1521.26,-823.23) U1.R8@1537.01,-807.48 ; U1.P7@1505.51,-775.98 v1(1521.26,-791.73) U1.P8@1537.01,-775.98 ; v1(1521.26,-728.74) U1.M8@1537.01,-712.99 ; v1(1521.26,-697.25) U1.L8@1537.01,-681.5 ; v1(1521.26,-665.75) U1.K8@1537.01,-650 ; v1(1521.26,-602.75) U1.J8@1537.01,-618.5 ; v1(1521.26,-571.26) U1.H8@1537.01,-587.01 ; v1(1521.26,-508.27) U1.F8@1537.01,-524.02 ; v1(1521.26,-476.77) U1.E8@1537.01,-492.52 ; v1(1552.75,-728.74) U1.M9@1568.5,-712.99 ; v1(1552.75,-697.25) U1.L9@1568.5,-681.5 ; v1(1552.75,-602.75) U1.J9@1568.5,-618.5 ; v1(1552.75,-571.26) U1.H9@1568.5,-587.01 ; U1.K9@1568.5,-650 v1(1584.25,-665.75) ; v1(1584.25,-602.75) U1.J10@1600,-618.5 ; v1(1584.25,-571.26) U1.H10@1600,-587.01 ; v1(1584.25,-350.79) U1.A10@1600,-366.54 ; U1.M10@1600,-712.99 v1(1615.75,-728.74) ; U1.L10@1600,-681.5 v1(1615.75,-697.25) ; U1.K10@1600,-650 v1(1615.75,-665.75) ; v1(1612.54,147.52) 1612.65,147.64 J8.6@1660.08,147.64 ; U1.P11@1631.5,-775.98 v1(1647.25,-791.73) ; U1.M11@1631.5,-712.99 v1(1647.25,-728.74) ; U1.L11@1631.5,-681.5 v1(1647.25,-697.25) ; U1.K11@1631.5,-650 v1(1647.25,-634.25) U1.K12@1662.99,-650 ; U1.J11@1631.5,-618.5 v1(1647.25,-602.75) U1.J12@1662.99,-618.5 ; U1.H11@1631.5,-587.01 v1(1647.25,-571.26) U1.H12@1662.99,-587.01 ; J8.8@1642.36,250 1642.36,208.69 v1(1642.54,208.52) ; U1.P12@1662.99,-775.98 v1(1678.74,-791.73) ; U1.M12@1662.99,-712.99 v1(1678.74,-728.74) ; U1.L12@1662.99,-681.5 v1(1678.74,-697.25) ; U1.F12@1662.99,-524.02 v1(1678.74,-508.27) ; U1.E12@1662.99,-492.52 v1(1678.74,-476.77) ; v1(1714.54,143.52) 1714.72,143.7 J8.5@1738.82,143.7 ; U1.R14@1725.98,-807.48 v1(1741.73,-823.23) ; U1.P14@1725.98,-775.98 v1(1741.73,-791.73) ; U1.M14@1725.98,-712.99 v1(1741.73,-728.74) ; U1.K14@1725.98,-650 v1(1741.79,-634.28) ; U1.H14@1725.98,-587.01 v1(1741.79,-571.28) ; U1.F14@1725.98,-524.02 v1(1741.73,-508.27) ; U1.E14@1725.98,-492.52 v1(1741.73,-476.77) ; R9.1@1736.54,-1071.54 1737,-1071.54 v1(1737,-1106) ; v1(1742.54,192.52) 1742.76,192.74 J8.11@1742.76,250 ; U1.R15@1757.48,-807.48 v1(1773.23,-823.23) ; U1.P15@1757.48,-775.98 v1(1773.23,-791.73) ; U1.M15@1757.48,-712.99 v1(1773.23,-728.74) ; U1.K15@1757.48,-650 v1(1773.23,-634.25) ; U1.H15@1757.48,-587.01 v1(1773.23,-571.26) ; U1.F15@1757.48,-524.02 v1(1773.23,-508.27) ; U1.E15@1757.48,-492.52 v1(1773.23,-476.77) ; U1.G16@1788.98,-555.51 v1(1804.73,-539.76) ; U1.G17@1820.47,-555.51 v1(1836.22,-539.76) ; J8.10@1837.24,250 1837.24,196.81 v1(1837.54,196.52) ; U1.L18@1851.97,-681.5 v1(1867.72,-697.25) ; U1.W19@1883.46,-933.46 v1(1899.21,-949.21) ; U1.A19@1883.46,-366.54 v1(1899.21,-350.79) ; J8.7@1919.92,147.64 1965.42,147.64 v1(1965.54,147.52) ; v1(1937.54,205.52) 1937.64,205.62 J8.9@1937.64,250 ; v1(1950.46,-161.75) C95.1@1981.54,-161.75 ; U16.2@2051.22,135.91 2065.65,135.91 v1(2086.54,115.02) 2086.59,114.96 R86.2@2126.54,114.96 ; v1(2081.54,-74.1) 2081.54,-101.48 2106.54,-101.48 C93.2@2106.54,-121.54 ; C94.2@2216.54,-121.54 2226.06,-121.54 v1(2226.06,-74.1) ; U15.2@2292.54,148.46 v1(2332.04,148.52) v1(2332.04,148.52) ; v1(2363.84,-681.48) 2365,-680.32 C4.1@2365,-657 ; v1(2461.54,9.52) 2462.56,9.52 2463.56,10.52 U2.2@2463.56,-27.1 ; v1(3086.76,-1520.6) 3102.48,-1536.33 J1.135@3102.48,-1615.1 ; v1(3093.54,-1095.48) 3094.02,-1095 C67.1@3120,-1095 ; v1(3097.54,-976.48) 3098.54,-975.48 C68.1@3126.54,-975.48 ; U5.11@3139,-322 3139,-260.47 v1(3139.53,-260.47) ; C70.1@3180.04,-1259.48 3180.04,-1207.98 v1(3180.54,-1207.48) ; U14.8@3236.93,-955 U14.19@3295,-955 ; C48.1@3253.79,-586.54 v1(3299.04,-586.48) v1(3299.04,-586.48) ; U5.6@3315,103 3316.54,108 v1(3316.54,57.52) ; LD1.1@3316.79,-681.04 3361.09,-681.04 v1(3364.04,-683.98) ; R70.2@3355,-750 v1(3386,-750) ; v1(3364.53,-260.47) 3364,-260.47 3364,-310.47 3366.47,-310.47 U5.12@3367,-311 ; v1(3400,-1155) 3400.54,-1155 R73.2@3400.54,-1179.48 ; v1(3433.26,-1544.23) 3437.64,-1544.23 3448.94,-1555.53 J1.157@3448.94,-1615.1 ; v1(3435.54,-761.98) 3436.54,-762.98 C66.1@3436.54,-804.04 ; R71.2@3436.54,-1114.98 3505.1,-1114.98 v1(3505.1,-1115.5) ; v1(3513.54,-813.98) 3516.54,-816.98 C65.1@3516.54,-846.54 ; v1(3774.18,-1527.1) 3795.18,-1548.1 3795.4,-1548.1 J1.179@3795.4,-1615.1
  Primary Side w12: J1.19@351.78,-1615.1 351.78,-1533.01 v1(351.95,-1532.84) ; v1(600,-1545) 603.74,-1548.74 J1.35@603.74,-1615.1 ; v1(784,-1541) 792.72,-1549.72 J1.47@792.72,-1615.1 ; v1(1099.21,92.6) 1099.21,74 1107.95,65.26 1147.26,65.26 A:C24.1@1169,87 ; v1(1201.95,-1541.84) 1202.17,-1542.06 J1.65@1202.17,-1615.1 ; U1.L5@1442.52,-681.5 v1(1458.27,-697.25) ; v1(1477,-1545) 1485.63,-1553.63 J1.83@1485.63,-1615.1 ; J1.97@1706.11,-1615.1 1706.11,-1556 v1(1718,-1544) ; J1.111@1926.58,-1615.1 1926.58,-1544 1936.58,-1534 v1(1959,-1534) ; v1(2404.51,-465.02) 2405,-465.51 U4.2@2405,-504 ; v1@2914.5,184.56 U5.10@2914.5,246.5 ; v1(3139.53,-260.47) 3139.53,-308.53 U5.11@3142,-311 ; v1(3384.53,209.53) 3386.56,207.5 U5.9@3432.5,207.5
  Primary Side w20: C74.1@2288,-399.5 2307.5,-380 2364,-380 C2.1@2365,-381 2365,-409 2404.51,-448.51 v1(2404.51,-465.02) ; v1(2399.34,-173.56) 2405,-179.22 U3.2@2405,-214
  Secondary Side w5.3: C47.1@943,-1086 961.95,-1086 966.1,-1081.84 v1@966.1,-1071 ; v1(965.95,-1070.84) v1@966.1,-1071 ; C46.1@993,-1071 v1@966.1,-1071 ; J9.1@1099.21,53.22 v1(1099.21,92.6) ; v1(1162,193) 1162.21,191 J9.10@1162.21,157.16 ; v1(1165,-1270) C45.1@1165,-1240 ; J9.19@1240.95,53.22 v1(1240.95,88.16) ; J9.29@1319.69,53.22 v1(1319.71,88.66) ; J9.51@1492.91,53.22 1492.91,15.98 v1(1493.51,15.98) ; v1(1521.26,-823.23) 1521.49,-823 C44.1@1525,-823 ; v1(1521.26,-791.73) 1521.26,-776 C13.1@1525,-776 ; v1(1521.26,-697.25) 1524.48,-697.25 C51.2@1524.48,-706.5 ; v1(1521.26,-665.75) 1521.26,-660.23 C50.2@1524.48,-657 ; C78.1@1581.95,-889.84 1583.95,-889.84 v1(1583.95,-917.84) ; C90.1@1605.2,-717.48 v1(1615.75,-728.74) ; v1(1615.95,-917.84) 1615.95,-889.84 C79.1@1620.95,-889.84 ; v1(1647.25,-728.74) 1647.25,-720.82 C54.2@1651.54,-716.54 ; D4.4@1830.69,24.24 1843.03,24.24 1848.03,19.24 1848.03,10.46 1853.54,4.98 v1(1853.54,-5.54)
  Secondary Side w8: J9.42@1414.17,157.16 v1(1414.18,196.53)
  Secondary Side w10: C18.1@101.54,-1153.04 135.04,-1186.54 v1(136.54,-1186.54) 170.04,-1153.04 C19.1@171.54,-1153.04 ; J1.10@194.3,-1615.1 194.3,-1541.54 v1(196.54,-1541.54) ; C10.1@206.54,-1021.54 206.54,-935.46 v1(207,-935) ; C22.1@241.54,-1153.04 243.09,-1153.04 v1(280.54,-1190.48) 316.54,-1154.48 C23.1@316.54,-1153.04 ; C26.1@381.54,-1153.04 382.09,-1153.04 v1(419.54,-1190.48) 456.54,-1153.48 C27.1@456.54,-1153.04 ; C11.1@491.54,-1021.54 491.54,-935.46 v1(492,-935) ; C30.1@521.54,-1153.04 552.06,-1183.56 v1(555.54,-1187.48) 558.91,-1184.1 565.47,-1184.1 C31.1@596.54,-1153.04 ; C34.1@661.54,-1153.04 661.54,-1156.48 v1(692.54,-1187.48) 695.91,-1184.1 705.47,-1184.1 C35.1@736.54,-1153.04 ; C12.1@771.54,-1026.54 771.54,-935.46 v1(772,-935) ; C38.1@806.54,-1153.04 812.58,-1153.04 v1@846.03,-1186.48 ; v1(845.04,-1187.48) v1@846.03,-1186.48 ; A:U8.4@854.81,-406.1 856.8,-405.6 v1(906.06,-405.6) ; C39.1@881.54,-1153.04 879.48,-1153.04 v1@846.03,-1186.48 ; v1(918.06,63.9) 919.81,65.65 A:C21.1@919.81,118.9 ; A:C23.1@919.81,-121.1 919.81,-175.76 v1(920.04,-175.98) ; C43.2@954,-1247.5 991.5,-1247.5 v1(992,-1248) 1005,-1248 1013,-1240 C42.2@1013,-1217 ; v1(970.04,-223.98) 970.04,-254.31 A:C26.1@970.24,-254.51 ; v1(1223.03,-442.52) 1241.54,-442.52 1251.54,-452.52 C81.1@1251.54,-491.54 ; C72.1@1241.54,-653.04 1241.54,-665.52 v1(1278.03,-665.52) 1278.03,-661.5 1308,-631.54 C89.1@1361.54,-631.54 ; C53.2@1270,-345 1300.79,-345 v1(1300.79,-350.79) ; v1(1383.46,-224.75) 1383.46,-224.48 1426.54,-224.48 C71.1@1426.54,-244.04 ; C63.2@1491.54,-576.54 C62.2@1531.54,-576.54 1523.6,-568.6 1523.6,-568.91 v1(1521.26,-571.26) ; C64.2@1496.3,-616.98 1496.54,-603.6 1497.38,-602.75 v1(1521.26,-602.75) ; v1(1552.75,-697.25) 1552.75,-716.54 C52.2@1564.9,-717.48 ; v1(1553,-964) 1553,-990 C49.2@1555,-990 ; v1(1584.25,-571.26) 1584.91,-570.6 1611.54,-570.6 C60.2@1611.54,-576.54 ; v1(1584.25,-350.79) 1586.54,-353.07 C88.1@1586.54,-401.54 ; v1(1605.54,-129.54) 1605.54,-173.04 C73.1@1606.54,-173.04 ; C54.2@1651.54,-716.54 1648.6,-713.6 v1@1648.6,-698.1 ; C56.2@1656.54,-671.54 1648.6,-671.54 v1@1648.6,-695.89 ; C59.2@1656.54,-536.54 1668.18,-524.89 1668.18,-517.6 1677.52,-508.27 v1(1678.74,-508.27) ; v1(1661.51,110.98) R79.2@1687,111 ; C87.1@1676.53,-407.52 1676.54,-382.29 v1(1678.74,-382.29) ; C85.1@1802.54,-664.54 1835.01,-664.54 v1(1867.72,-697.25) ; v1(1836.22,-539.76) 1869.45,-506.54 C86.1@1871.54,-506.54 ; v1(1899.21,-949.21) 1919.21,-949.21 C57.2@1925,-955 ; v1(1899.21,-350.79) 1910,-350.79 C58.2@1910,-350 ; C75.1@1976.54,-883.04 2017.12,-883.04 v1(2017.18,-883.1) ; R11.1@2001.54,-581.54 v1(2001.54,-550.48) ; C76.1@2041.54,-431.54 C77.1@2041.54,-386.54 v1(2068.04,-386.48) v1(2068.04,-386.48) ; C92.1@2075.04,-331.54 v1(2116.54,-331.48) v1(2116.54,-331.48) ; v1(2237.54,-293.54) 2237.54,-241.54 C91.1@2249.04,-241.54 ; v1(2461.54,9.52) C1.1@2461.54,43.46 ; R22.2@2940,-925 v1(2940,-895) ; R23.2@2990,-925 v1(2990,-895) ; C6.1@3271.54,28.46 3300.59,28.46 v1(3301.54,27.52) ; v1(3396.54,-81.48) R17.2@3396.54,-41.54 ; v1@1648.6,-698.1 v1@1648.6,-695.89 ; v1@1648.6,-698.1 v1(1647.25,-697.25) v1@1648.6,-695.89
  Secondary Side w12: v1(382.95,-1532.84) 383.27,-1533.17 J1.22@383.27,-1615.1 ; v1(635,-1542) 635.31,-1542.31 J1.38@635.31,-1615.1 ; v1(747,-1533) 761,-1547 761.31,-1547 J1.46@761.31,-1615.1 ; C9.1@918.95,-849.84 987.34,-849.84 C16.1@992.5,-855 ; v1(981.51,-798.02) 981.51,-855 C16.1@992.5,-855 ; C14.1@990.5,-956 990.5,-857 C16.1@992.5,-855 ; v1(1123.03,-787.52) 1124.05,-786.5 C83.1@1160,-786.5 ; v1(1243,-1333) 1243.5,-1332.5 C17.1@1300,-1332.5 ; C80.1@1412.52,-320 1412.52,-244.04 C71.1@1426.54,-244.04 ; v1(1552.75,-571.26) 1566.26,-571.26 C61.2@1571.54,-576.54 ; v1(1678.74,-697.25) 1696.54,-715.04 C55.2@1696.54,-716.54 ; v1(1764,-1091) 1764,-1075.53 1774.53,-1065 C84.1@1774.53,-1030.47 ; v1(2399.34,-173.56) 2400,-174.22 C3.1@2400,-210 ; v1(2404.51,-465.02) 2404.51,-509.51 C5.1@2405,-510
  Secondary Side w20: v1(830,29) A:C31.1@830,163 v1(830,253) ; v1(1433.4,-1375.48) 1433.4,-1332.5 C15.1@1450,-1332.5
  other v1: 2914.53,184.53
HSEC_5V0: D1.2 J1.48 J1.84 J1.98 J1.112 J1.158 J1.180 | length 759.1
  Primary Side w5.3: D1.2@3596.54,-1101.54 3596.54,-1100 v2(3645,-1100) v2(3645,-1130) v2(3645,-1160)
  Secondary Side w10: J1.48@792.72,-1615.1 792.72,-1569 810,-1551.72 v1(810,-1496) ; J1.84@1485.67,-1615.1 1485.67,-1564.33 1500,-1550 v1(1500,-1525) ; v1(1695,-1525) 1696.17,-1526.17 1696.17,-1558.17 1706.17,-1568.17 J1.98@1706.17,-1615.1 ; J1.112@1926.67,-1615.1 1926.67,-1545 1935,-1536.67 v1(1935,-1510) ; J1.158@3449.01,-1615.1 3449.01,-1555 3459.01,-1545 3459.01,-1530.99 v1(3460,-1530) ; v1(3775,-1490) 3795,-1510 3795.51,-1510 J1.180@3795.51,-1615.1
HSEC_ADC-A0: J1.9 R27.1 | length 245.5
  Primary Side w4.5: R27.1@150,-1423.5 150,-1436.5 150.42,-1436.92 162.92,-1436.92 175.5,-1449.5 175.5,-1501.5 188.5,-1514.5 202.34,-1514.5 214.18,-1526.34 214.18,-1548.1 193.27,-1569.01 191.27,-1569.01 194.3,-1572.04 J1.9@194.3,-1615.1
HSEC_ADC-A1: J1.11 R28.1 | length 251.9
  Primary Side w4.5: R28.1@215,-1423.5 225.79,-1433.5 225.79,-1443 195,-1443 188.5,-1449.5 188.5,-1495 195,-1501.5 206.29,-1501.5 225.79,-1521 J1.11@225.79,-1615.1
HSEC_ADC-A2: J1.15 R29.1 | length 216.7
  Primary Side w4.5: R29.1@280,-1423.5 280,-1443 296.5,-1443 303,-1449.5 303,-1465 299,-1469 299,-1544.5 290,-1553.5 290,-1613.89 J1.15@288.78,-1615.1
HSEC_ADC-A3: J1.17 R30.1 | length 216.6
  Primary Side w4.5: J1.17@320.28,-1615.1 320,-1614.82 320,-1553.5 312,-1545.5 312,-1475.5 325,-1462.5 325,-1443 331.5,-1436.5 345,-1436.5 R30.1@345,-1423.5
HSEC_ADC-A4: J1.21 R31.1 | length 221.3
  Primary Side w4.5: J1.21@383.27,-1615.1 383.27,-1570.54 401.54,-1552.27 401.54,-1536.48 432.54,-1505.48 432.54,-1446.04 R31.1@410,-1423.5
HSEC_ADC-A5: J1.23 R32.1 | length 216.6
  Primary Side w4.5: J1.23@414.77,-1615.1 414.77,-1543.25 445.54,-1512.48 445.54,-1452.96 R32.1@475,-1423.5
HSEC_ADC-B0: J1.12 R33.1 | length 256.3
  Secondary Side w4.5: R33.1@115,-1423.5 115,-1428 136.5,-1449.5 136.5,-1457 155,-1475.5 175.5,-1475.5 234,-1534 234,-1548.58 225.79,-1556.79 J1.12@225.79,-1615.1
HSEC_ADC-B1: J1.14 R34.1 | length 254.9
  Secondary Side w4.5: R34.1@180,-1423.5 156,-1447.5 156,-1456 162.5,-1462.5 182,-1462.5 247,-1527.5 247,-1549.71 257.29,-1560 J1.14@257.29,-1615.1
HSEC_ADC-B2: J1.18 R35.1 | length 242.2
  Secondary Side w4.5: R35.1@245,-1423.5 245,-1430 266.5,-1449.5 266.5,-1488.5 279.5,-1501.5 312,-1501.5 318.5,-1508 318.5,-1612 J1.18@320.28,-1615.1
HSEC_ADC-B3: J1.20 R36.1 | length 253.2
  Secondary Side w4.5: R36.1@310,-1423.5 279.5,-1454 279.5,-1482 286,-1488.5 318.5,-1488.5 331.5,-1501.5 331.5,-1551.54 350,-1570.04 350,-1613.33 J1.20@351.78,-1615.1
HSEC_ADC-B4: J1.24 R37.1 | length 217.9
  Secondary Side w4.5: R37.1@375,-1423.5 375,-1430 396.5,-1449.5 396.5,-1470.19 408.31,-1482 414.81,-1482 421.31,-1488.5 421.31,-1547 414.81,-1553.5 J1.24@414.81,-1615.1
HSEC_ADC-B5: J1.26 R38.1 | length 228.4
  Secondary Side w4.5: R38.1@440,-1423.5 441.26,-1424.76 422.76,-1443.26 415.74,-1443.26 409.5,-1449.5 409.5,-1462.5 416,-1469 422.5,-1469 435.5,-1482 435.5,-1536.24 446.26,-1547 J1.26@446.26,-1615.1
HSEC_ADC-C2: J1.31 R41.1 | length 305.6
  Primary Side w4.5: 550.28,-1531.22 586.5,-1495 656.5,-1495 693.54,-1457.96 693.54,-1447.04 R41.1@670,-1423.5
  Primary Side w5.3: J1.31@540.75,-1615.1 540.75,-1572.48 550.28,-1562.95 550.28,-1531.22
HSEC_ADC-C3: J1.33 R42.1 | length 307.3
  Primary Side w4.5: J1.33@572.25,-1615.1 572.25,-1570.48 564.54,-1562.77 564.54,-1534.96 591.5,-1508 663,-1508 709.02,-1461.98 709.02,-1449.48 R42.1@735,-1423.5
HSEC_ADC-C4: J1.37 R43.1 | length 330.2
  Primary Side w4.5: J1.37@635.24,-1615.1 635,-1615.1 635,-1569.54 652.5,-1552.04 652.5,-1537.52 727.52,-1462.5 816.52,-1462.5 821.54,-1457.48 821.54,-1445.04 R43.1@800,-1423.5
HSEC_ADC-C5: J1.39 R44.1 | length 326.4
  Primary Side w4.5: J1.39@666.74,-1615.1 666.74,-1543.28 734.52,-1475.5 824.52,-1475.5 838.54,-1461.48 838.54,-1449.96 R44.1@865,-1423.5
HSEC_ADC-D0: J1.28 R45.1 | length 225.6
  Secondary Side w4.5: J1.28@477.76,-1615.1 477.76,-1553.5 487.63,-1543.63 487.63,-1520.87 533,-1475.5 533,-1456 R45.1@507,-1430
  Secondary Side w5.3: R45.1@505,-1423.5 R45.1@507,-1430
HSEC_ADC-D1: J1.30 R46.1 | length 231.4
  Secondary Side w4.5: J1.30@509.26,-1615.1 509.26,-1553.5 500.5,-1544.74 500.5,-1527.5 546,-1482 546,-1449.5 557.47,-1438.03 569.26,-1438.03 569.26,-1423.5 R46.1@570,-1423.5
HSEC_ADC-D2: J1.34 R47.1 | length 251.6
  Secondary Side w4.5: J1.34@572.31,-1615.1 572.31,-1547 601.41,-1517.91 614.09,-1517.91 656.5,-1475.5 656.5,-1449.5 650,-1443 635,-1443 R47.1@635,-1423.5
HSEC_ADC-D3: J1.36 R48.1 | length 242.8
  Secondary Side w4.5: J1.36@603.81,-1615.1 605,-1615.1 605,-1571.54 618.54,-1558 618.54,-1532.96 668.88,-1482.62 668.88,-1456 681.88,-1443 700,-1443 R48.1@700,-1423.5
HSEC_ADC-D4: J1.40 R49.1 | length 238.7
  Secondary Side w4.5: J1.40@666.81,-1615.1 666.81,-1549.69 677,-1539.5 688,-1539.5 765,-1462.5 R49.1@765,-1423.5
HSEC_ADC-D5: J1.42 R50.1 | length 250.8
  Secondary Side w4.5: J1.42@698.31,-1615.1 698.31,-1547.22 780.43,-1465.1 786.5,-1465.1 828.1,-1423.5 R50.1@830,-1423.5
HSEC_ADC-VREFHI: J1.45 R59.2 | length 558.5
  Primary Side w5.3: J1.45@761.22,-1615.1 761.22,-1549.5 765.5,-1545.22 765.5,-1525.5 v1(776,-1515)
  Inner Layer 7 w5.5: v1(776,-1515) 794,-1515 797,-1518 819,-1518 826,-1511 826,-1486 924,-1388 948,-1388 996,-1340 v1(996,-1292)
  Secondary Side w5.3: v1(996,-1292) 997.5,-1290.5 R59.2@1090,-1290.5
HSEC_ADCIN14: J1.25 R39.1 | length 270.9
  Primary Side w4.5: J1.25@446.26,-1615.1 446.26,-1568.48 454.03,-1560.72 454.03,-1540.97 519.5,-1475.5 552.48,-1475.5 565.5,-1462.48 565.5,-1449 R39.1@540,-1423.5
HSEC_ADCIN15: J1.27 R40.1 | length 269.8
  Primary Side w4.5: J1.27@477.76,-1615.1 477.76,-1569.48 468.54,-1560.26 468.54,-1547.48 527.52,-1488.5 557.49,-1488.5 578.5,-1467.49 578.5,-1449.5 604.5,-1423.5 R40.1@605,-1423.5
HSEC_GPIO-42: J1.93 J2.3 | length 1075.8
  Primary Side w5: J1.93@1643.11,-1615.1 1643.54,-1614.68 1643.54,-1536.35 1643.18,-1536.35 v1(1627.43,-1520.6) 1643.18,-1504.85 1643.18,-1474 1649.34,-1467.84 1649.34,-1408.66 1908.5,-1149.5 2249.5,-1149.5 2288,-1111 2288,-1085.48 J2.3@2241.54,-1039.02
HSEC_GPIO-43: J1.95 J3.3 | length 1076.3
  Primary Side w5: J1.95@1674.61,-1615.1 1674.61,-1504.78 v1(1658.93,-1489.1) 1674.54,-1473.5 1674.54,-1463.52 1661,-1449.98 1661,-1413.5 1914,-1160.5 2255,-1160.5 2299,-1116.5 2299,-1081.55 J3.3@2341.54,-1039.02
HSEC_GPIO-46: J1.94 J4.3 | length 1332.6
  Secondary Side w4.5: J1.94@1643.17,-1615.1 1643.17,-1536.35 ; 1643.18,-1536.35 v1(1658.93,-1520.6) 1643.18,-1504.85 1643.18,-1476.52 1657.5,-1462.2 1657.5,-1410.5 1729,-1339 2112.5,-1339 2151.5,-1300 2151.5,-1183 2197,-1137.5 2457,-1137.5 2483,-1111.5 2483,-1078 2451.54,-1046.54 2449.06,-1046.54 J4.3@2441.54,-1039.02
HSEC_GPIO-47: J1.96 J5.3 | length 1328.6
  Secondary Side w4.5: J1.96@1674.67,-1615.1 1674.67,-1504.85 ; 1674.68,-1504.85 v1(1690.43,-1489.1) 1670.5,-1469.17 1670.5,-1417 1735.5,-1352 2119,-1352 2164.5,-1306.5 2164.5,-1189.5 2203.5,-1150.5 2463.5,-1150.5 2496,-1118 2496,-1084.55 J5.3@2541.54,-1039.02
HSEC_GPIO-120: J1.165 J7.3 | length 1317.3
  Primary Side w4.5: J1.165@3574.92,-1615.1 3574.92,-1504.85 v1(3590.69,-1489.1)
  Secondary Side w4.5: J7.3@2741.54,-1039.02 2697.5,-1083.05 2697.5,-1124.5 2710.5,-1137.5 2899,-1137.5 3146,-1384.5 3549,-1384.5 3581.5,-1417 3581.5,-1467.33 3590.69,-1476.52 v1(3590.69,-1489.1)
HSEC_GPIO-121: J1.166 J6.3 | length 1317
  Secondary Side w4.5: J6.3@2641.54,-1039.02 2684.5,-1081.98 2684.5,-1131 2704,-1150.5 2892.5,-1150.5 3139.5,-1397.5 3542.5,-1397.5 3568.5,-1423.5 3568.5,-1467.21 3559.19,-1476.52 v1(3559.19,-1489.1) 3575.01,-1504.85 J1.166@3575.01,-1615.1
IN_5V0: C65.2 C66.2 D1.1 R62.2 R64.2 R65.1 R69.2 TP4.1 U14.3 | length 965.7
  Primary Side w10: R65.1@3120,-1045 3120,-1023.48 3134,-1009.48 v1(3183.54,-1009.48) R64.2@3183.54,-975.48 ; U14.3@3353.07,-955 3383.02,-955 3389.54,-948.48 v1(3409.54,-948.48) R69.2@3436.54,-948.48 ; C66.2@3436.54,-886.54 C66.2@3436.54,-879.04 ; D1.1@3596.54,-999.04 3699.04,-999.04 TP4.1@3701.54,-1001.54
  Primary Side w20: R69.2@3436.54,-948.48 3436.54,-886.54 C65.2@3516.54,-886.54 R62.2@3596.54,-886.54
  Primary Side w30: D1.1@3596.54,-999.04 R62.2@3596.54,-886.54
  Secondary Side w10: v1(3183.54,-1009.48) 3223.54,-1009.48 3250.54,-1036.48 3378.04,-1036.48 3409.54,-1004.98 v1(3409.54,-948.48)
MCU_ADC-A0: C18.2 R27.2 U1.U1 U6.1 | length 1833.1
  Primary Side w4.5: U6.1@97.6,-1221 100,-1223.4 v1(100,-1261.54) ; R27.2@150,-1356.5 R27.2@150,-1351.48
  Primary Side w5.3: v1(100,-1261.54) 128.59,-1261.54 131.54,-1264.48 131.54,-1274.48 172.54,-1315.48 172.54,-1328.94 R27.2@150,-1351.48 ; v1(1300.79,-886.22) U1.U1@1316.54,-870.47
  Inner Layer 3 w4.3: v1(100,-1261.54) 125,-1261.54 132,-1268.54 132,-1287 159,-1314 192,-1314 215.54,-1290.46 215.54,-1165.54 274.07,-1107 897.79,-1107 956,-1048.79 956,-905 985,-876 1290.56,-876 v1(1300.79,-886.22)
  Secondary Side w5.3: v1(100,-1261.54) 100,-1223.5 C18.2@101.54,-1220.04
MCU_ADC-A1: C19.2 R28.2 U1.T1 U6.3 | length 1816.5
  Primary Side w4.5: v1(172.4,-1260) U6.3@172.4,-1221
  Primary Side w5.3: v1(172.4,-1260) 171.54,-1259.48 148.54,-1259.48 144.54,-1263.48 144.54,-1268.48 186.54,-1310.48 186.54,-1328.04 R28.2@215,-1356.5 ; v1(1300.79,-854.73) U1.T1@1316.54,-838.98
  Inner Layer 3 w4.3: v1(172.4,-1260) 147.54,-1260 141,-1266.54 141,-1283 163,-1305 186,-1305 206.18,-1284.82 206.18,-1160.89 269.07,-1098 893.79,-1098 946.5,-1045.29 946.5,-900.5 980,-867 1288.51,-867 v1(1300.79,-854.73)
  Secondary Side w5.3: C19.2@171.54,-1220.04 172.4,-1240.9 v1(172.4,-1260)
MCU_ADC-A2: C20.2 R29.2 U1.U2 U6.4 | length 1747.7
  Primary Side w4.5: U6.4@172.4,-1119 172.4,-1147.34 183.54,-1158.48 194.34,-1158.48 209.54,-1173.67 209.54,-1254.54 276.54,-1321.54 276.54,-1353.04 R29.2@280,-1356.5
  Primary Side w5.3: C20.2@171.54,-1040.04 v1(171.54,-1081.54) 172.4,-1082.4 U6.4@172.4,-1119 ; v1(1332.28,-886.22) U1.U2@1348.03,-870.47
  Inner Layer 4 w4.3: v1(171.54,-1081.54) 158.5,-1068.5 144.5,-1068.5 138,-1062 138,-1014 180,-972 908,-972 1019,-861 1281,-861 1290.48,-870.48 1316.54,-870.48 v1(1332.28,-886.22)
MCU_ADC-A3: C21.2 R30.2 U1.T2 U6.6 | length 1956.7
  Primary Side w4.5: C21.2@96.54,-1040.04 v1(96.54,-1081.54) 97.6,-1082.6 U6.6@97.6,-1119 ; U6.6@97.6,-1116.54 U6.6@97.6,-1119 ; R30.2@345,-1356.5 309.96,-1391.54 256.54,-1391.54 246.54,-1381.54 246.54,-1310.48 196.54,-1260.48 196.54,-1181.54 186.54,-1171.54 177.6,-1171.54 171.54,-1165.47 116.54,-1165.47 97.6,-1146.54 U6.6@97.6,-1119 ; v1(1332.28,-854.73) U1.T2@1348.03,-838.98
  Inner Layer 4 w4.3: v1(96.54,-1081.54) 110.54,-1067.54 123.46,-1067.54 129,-1062 129,-1009.07 175.07,-963 903,-963 1014,-852 1281,-852 1294.02,-838.98 1316.54,-838.98 v1(1332.28,-854.73)
MCU_ADC-A4: C22.2 R31.2 U1.U3 U7.1 | length 1792
  Primary Side w4.5: U7.1@242.6,-1221 v1(242.6,-1256.54) 264.47,-1256.54 272.54,-1264.61 272.54,-1281.49 308.54,-1317.48 427.54,-1317.48 436.54,-1326.48 436.54,-1329.48 419.54,-1346.48 410,-1346.48 R31.2@410,-1356.5
  Primary Side w5.3: v1(1363.78,-886.22) U1.U3@1379.53,-870.47
  Inner Layer 3 w4.3: v1(242.6,-1256.54) 243.66,-1255.48 267,-1255.48 276,-1264.48 276,-1300.69 289.31,-1314 354,-1314 375.54,-1292.46 375.54,-1201.48 449.02,-1128 987,-1128 1194,-921 1280.48,-921 1293,-933.52 1311.48,-933.52 1316.54,-928.46 1316.54,-911.46 1326.54,-901.46 1348.54,-901.46 v1(1363.78,-886.22)
  Secondary Side w5.3: C22.2@241.54,-1220.04 242.6,-1221.1 v1(242.6,-1256.54)